# Altium PCB SB0037A.PcbDoc (part 5 of 7)
Units mil, origin at the board's own origin, x right, y up, seen from the top; angles counter-clockwise.
Board outline 2872.5 x 4560 mil, 6 copper layers (Top Layer, L2, L3, L4, L5, Bottom Layer), stack 30.268 mil thick; 282 components, 292 nets, 1320 pads, 687 vias.
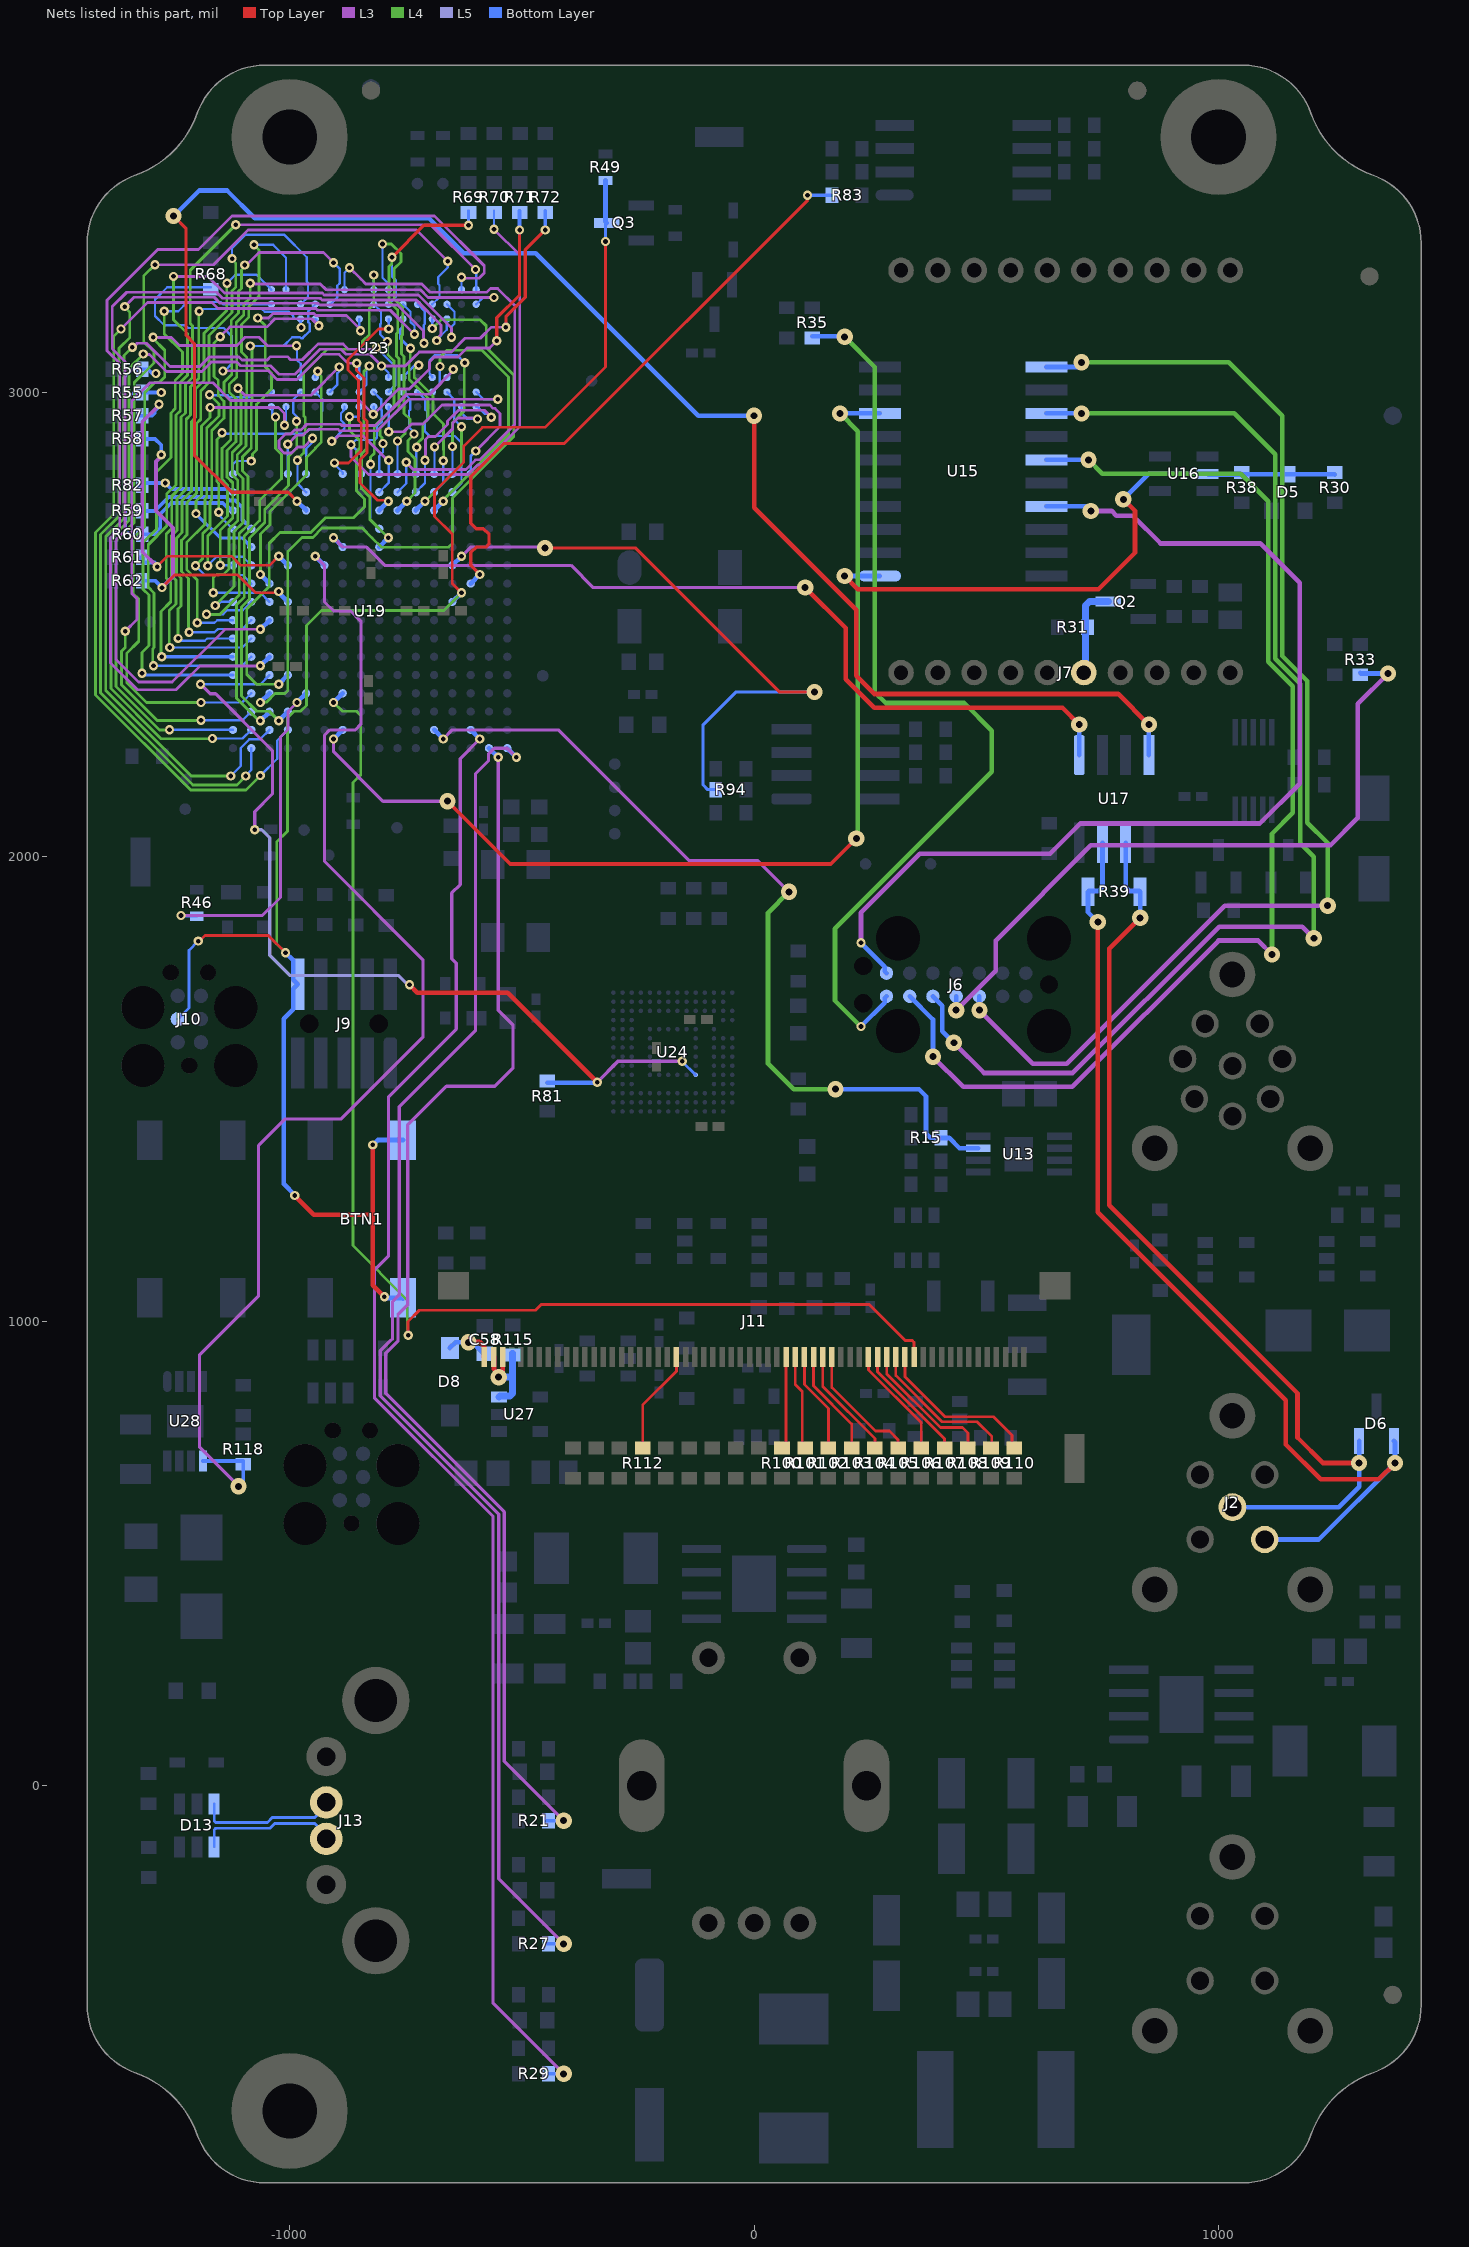
[diagram p7: the nets of this part, all layers, seen from the top]

## Via types
v1: diameter 20, hole 10, Top Layer to Bottom Layer, tented both sides, 484 vias
v2: diameter 35, hole 15, Top Layer to Bottom Layer, tented both sides, 197 vias
v3: diameter 20, hole 10, Top Layer to Bottom Layer, tented top, 6 vias

## Nets (pads, with @x,y where several pads share a name; then routed paths per layer and width w, separated by ;. In a path a pad name is that pad's centre, name@x,y a point inside that pad or via, vN(x,y) a via of type N, cw(c..) or ccw(c..) an arc to the next point about the centre after c; other vN are vias at no path point) (continued)
\LCD_RESET_N: J11.13 U19.K4 | length 2688.1
  Top Layer w6: v1(-745,970.47) -745,1000 -721,1024 -471,1024 -458.39,1036.61 247.83,1036.61 325.44,959 340.44,959 344.49,954.96 J11.13@344.49,923.23
  L4 w6: v1(-905.51,2332.68) -886.51,2313.68 -856,2313.68 -847,2304.68 -847,2177 -863.83,2160.17 -863.83,1163.25 -747,1046.43 -747,972.47 v1(-745,970.47)
  Bottom Layer w10: v1(-905.51,2332.68) U19.K4@-885.83,2352.36
\MODEM_RESET: J7.5 Q2.3 R31.1 | length 198.4
  Bottom Layer w15: J7.5@710.04,2397 713.54,2400.5 713.54,2495 713.54,2541.21 722.33,2550 Q2.3@762.6,2550
\RST: BTN1.A J9.10 J10.3 Q3.3 R49.1 U19.D9 | length 3868.1
  Top Layer w6: v1(-1197.15,1818.85) -1194.58,1818.85 -1182.43,1831 -1046,1831 v1(-1009,1794) ; v1(-629.92,2568.9) -650,2588.98 -650,2695 -688.29,2733.29 -688.29,2786.71 -625,2850 -625,2885 -585,2925 -450,2925 -320,3055 v1(-320,3325)
  Top Layer w10: v1(-989,1271) -948,1230 -821,1230 ; v1(-821,1380) -821,1230 ; v1(-796,1053) -821,1078 -821,1230
  L4 w6: v1(-1009,1794) -1028,1813 -1028,2032 -1004.62,2055.38 -1004.62,2299.81 -990.75,2313.68 -976.38,2313.68 -963.88,2326.18 -963.88,2498.03 -931.4,2530.51 -668.31,2530.51 v1(-629.92,2568.9)
  Bottom Layer w6: J10.3@-1241,1651 -1217,1675 -1217,1799 v1(-1197.15,1818.85) ; v1(-320,3325) -320,3362.4 Q3.3@-317.4,3365
  Bottom Layer w10: v1(-1009,1794) -992.5,1777.5 -992.5,1735.5 J9.10@-983,1726 -992.5,1716.5 -992.5,1672.5 -1013,1652 -1013,1296 v1@-988.5,1271.5 ; v1(-821,1380) -820.62,1380 -810.14,1390.47 BTN1.A@-756,1390.47 ; v1(-796,1053) -793.47,1050.47 BTN1.A@-756,1050.47 BTN1.A@-756,1049 ; U19.D9@-649.61,2549.21 v1(-629.92,2568.9) ; R49.1@-320,3456.46 -320,3367.6 Q3.3@-317.4,3365
\SD_RESET: R81.2 U19.P5 U24.K5 | length 2018.5
  Top Layer w10: v1(-742,1725) -725,1708 -530.91,1708 v1(-337.91,1515)
  L3 w7: v1(-1191.93,2372.05) -1171.44,2351.56 -1159.56,2351.56 -1037,2229 -1037,2136 -1075.33,2097.67 v1(-1075.33,2058.66)
  L3 w8: v1(-337.91,1515) -292.91,1560 v1(-155,1560)
  L5 w7: v1(-1075.33,2058.66) -1075.17,2058.5 -1060.5,2058.5 -1043,2041 -1043,1788 -1000,1745 -766,1745 -746,1725 v1(-742,1725)
  Bottom Layer w5: v1(-1191.93,2372.05) -1062.99,2372.05 U19.P5@-1043.31,2391.73
  Bottom Layer w6: v1(-155,1560) U24.K5@-125.79,1530.79
  Bottom Layer w10: R81.2@-445,1513.54 -339.37,1513.54 v1(-337.91,1515)
\SD_WP: R82.2 U19.T15 | length 209.7
  Bottom Layer w8: R82.2@-1321.46,2800 -1316.34,2805.12 v1(-1267.72,2805.12) -1254.92,2792.32 -1131.57,2792.32 -1124.68,2785.43 U19.T15@-1122.05,2785.43
\SENSOR_FAULT: R15.1 U13.3 U19.E2 | length 1887.9
  L3 w7: v1(-669.29,2253.94) -649.79,2273.44 -421.44,2273.44 -140,1992 8,1992 v2(75,1925)
  L4 w10: v2(75,1925) 30,1880 30,1555 85,1500 v2(175,1500)
  Bottom Layer w10: U19.E2@-688.98,2273.62 v1(-669.29,2253.94) ; v2(175,1500) 355,1500 370,1485 370,1405 379.56,1395.44 398.1,1395.44 398.54,1395 420,1395 442.21,1372.79 U13.3@482.4,1372.79
\SPIFI_CS: R83.2 U19.C10 | length 1339.3
  Top Layer w7: v1(-590.55,2608.27) -610.05,2627.77 -610.05,2655.72 -598.63,2667.14 -577.86,2667.14 -570.68,2674.32 -570.68,2694.72 -582.84,2706.88 -598.63,2706.88 -610.05,2718.3 -610.05,2818.83 -538.88,2890 -409.39,2890 115,3414.39 v1(115,3425)
  Bottom Layer w7: v1(115,3425) R83.2@171.46,3425
  Bottom Layer w10: U19.C10@-610.24,2588.58 v1(-590.55,2608.27)
\SSP1_CS_FRAM: R94.2 U19.D11 | length 1359.7
  Top Layer w7: v2(-450,2665) -255,2665 55,2355 v2(130,2355)
  L3 w7: v1(-629.92,2647.64) -610.42,2667.14 -452.14,2667.14 v2(-450,2665)
  Bottom Layer w7: R94.2@-78.54,2145 -100,2145 -110,2155 -110,2285 -40,2355 v2(130,2355)
  Bottom Layer w10: U19.D11@-649.61,2627.95 v1(-629.92,2647.64)
\TRST: R46.1 U19.M4 | length 727.1
  L3 w6: v1(-1234,1874) -1059.07,1874 -1020,1913.07 -1020,2258 -1003.45,2274.55 -1003.45,2313.48 v1(-984.25,2332.68)
  Bottom Layer w6: v1(-1234,1874) -1232.46,1872.46 R46.1@-1200,1872.46
  Bottom Layer w10: v1(-984.25,2332.68) U19.M4@-964.57,2352.36
\USB_HOST_FAULT: R118.1 U19.L11 U28.5 | length 2695.6
  L3 w7: v2(-1110,645) -1194,729 -1194,928.5 -1067,1055.5 -1067,1379 -1010,1436 -889,1436 -713,1612 -713,1778.5 -925.01,1990.51 -925.01,2262.01 -913.41,2273.62 -858.25,2273.62 -846.5,2285.37 -846.5,2507.5 -868.53,2529.53 -905.53,2529.53 -925.01,2549.01 -925.01,2627.77 v1(-944.88,2647.64)
  Bottom Layer w8: U28.5@-1186.61,699.37 -1100,699.37 -1100,655 v2(-1110,645)
  Bottom Layer w10: v1(-944.88,2647.64) U19.L11@-925.2,2627.95
B0: J11.18 R106.1 | length 246.9
  Top Layer w6: J11.18@246.06,923.23 246.06,895.67 360,781.73 R106.1@360,723.54
B1: J11.17 R107.1 | length 259.5
  Top Layer w6: J11.17@265.75,923.23 265.75,891.54 397.45,759.84 397.64,759.84 410,747.48 R107.1@410,723.54
B2: J11.16 R108.1 | length 300.1
  Top Layer w6: J11.16@285.43,923.23 285.43,887.41 401,771.84 402.61,771.84 402.8,771.65 448.35,771.65 460.63,759.37 460.63,724.17 R108.1@460,723.54
B3: J11.15 R109.1 | length 330.2
  Top Layer w6: J11.15@305.12,923.23 305.12,883.28 404.56,783.84 479.94,783.84 511.81,751.97 511.81,725.35 R109.1@510,723.54
B4: J11.14 R110.1 | length 361.1
  Top Layer w6: J11.14@324.8,923.23 324.8,880.8 410.76,794.84 515.16,794.84 555.08,754.92 555.08,723.54 R110.1@560,723.54
BL+: C58.2 D8.2 J11.60 | length 151.5
  Top Layer w10: v2(-615,955) -614.14,955.86 -590.86,955.86 -581.61,946.61 -581.61,924.13 J11.60@-580.71,923.23
  Bottom Layer w10: D8.2@-655,942.83 -642.83,955 v2(-615,955) -610.22,950.22 -601.72,950.22 -581.97,930.46 C58.2@-580,930.46
BL-: J11.58 J11.59 R115.2 U27.3 | length 243.5
  Top Layer w10: J11.59@-561.02,923.23 -560.12,922.32 -560.12,896.88 -550,886.76 v2(-550,880) -541.34,888.66 J11.58@-541.34,923.23
  Bottom Layer w15: v2(-550,880) -520,880 ; U27.3@-549.29,837.4 -547.08,839.62 -525.38,839.62 -520,845 -520,880 ; R115.2@-520,931.46 -520,880
BOARD_ID0: R58.2 R62.1 U19.N9 | length 749.9
  Top Layer w6: v1(-1275,2580) -1247.72,2607.28 -1152.85,2607.28 -1152.56,2607.58 -1112.5,2607.58 -1073.82,2568.9 -1026.22,2568.9 v1(-1023.62,2571.5)
  L3 w8: v1(-1276.57,2866.14) -1276.57,2862.89 -1287.72,2851.75 -1287.72,2745.41 -1251,2708.69 -1251,2604 v1(-1275,2580)
  Bottom Layer w8: R62.1@-1321.46,2595 -1290,2595 v1(-1275,2580) ; R58.2@-1321.46,2900 -1289.76,2900 -1276.57,2886.81 v1(-1276.57,2866.14)
  Bottom Layer w10: v1(-1023.62,2571.5) -1023.62,2568.9 U19.N9@-1003.94,2549.21
BOARD_ID1: R57.2 R61.1 U19.N11 | length 797.8
  Top Layer w6: v1(-1285.5,2625.13) -1262.99,2647.64 -1125,2647.64 -1105.32,2627.95 -1043.31,2627.95 v1(-1023.62,2647.64)
  L3 w8: v1(-1285.5,2625.13) -1317.31,2656.94 -1317.31,2936.84 -1281.42,2972.73 v1(-1281.42,2974.45)
  Bottom Layer w8: R61.1@-1321.46,2645 -1321.46,2640.08 -1315.62,2634.24 -1290.96,2634.24 -1290.96,2633.84 -1285.5,2628.38 v1(-1285.5,2625.13) ; R57.2@-1321.46,2950 -1296.06,2950 -1290.41,2955.66 -1290.41,2960.49 -1281.42,2969.48 v1(-1281.42,2974.45)
  Bottom Layer w10: v1(-1023.62,2647.64) U19.N11@-1003.94,2627.95
BOARD_ID2: R56.2 R60.1 U19.T14 | length 697.4
  Bottom Layer w6: R60.1@-1321.46,2695 -1343.62,2695 -1353.35,2704.72 -1353.35,2744.29 -1357.28,2748.22 -1357.28,3031.5 -1337.6,3051.18 -1322.64,3051.18 R56.2@-1321.46,3050
  Bottom Layer w8: R60.1@-1321.46,2695 -1292.2,2695 -1278.54,2708.66 -1278.54,2738.51 -1254.79,2762.26 -1144.33,2762.26 -1136.65,2754.57 -1133.19,2754.57 -1124.68,2746.06 U19.T14@-1122.05,2746.06 ; R56.2@-1321.46,3050 -1304.54,3050 -1295.54,3041 v1(-1288,3041)
BOARD_ID3: R55.2 R59.1 U19.R13 | length 633.3
  Bottom Layer w6: R59.1@-1321.46,2745 -1338.5,2745 -1345.47,2751.97 -1345.47,2990.16 -1336.61,2999.02 -1322.44,2999.02 R55.2@-1321.46,3000
  Bottom Layer w8: R59.1@-1321.46,2745 -1290.43,2745 -1260.17,2775.26 -1137.13,2775.26 -1129.44,2767.57 -1116.98,2767.57 -1102.36,2752.95 -1102.36,2726.38 U19.R13@-1082.68,2706.69 ; R55.2@-1321.46,3000 v1(-1276.57,3000)
CAN0_H: D6.1 J2.4 R39.2 U17.7 | length 2175.3
  Top Layer w10: v2(740,1860) 740,1235 1145,830 1145,735 1220,660 1345,660 v2(1380,695)
  Bottom Layer w10: v2(740,1860) 718.9,1881.1 R39.2@718.9,1925 720.72,1926.82 741.82,1926.82 750,1935 U17.7@750,2030.51 ; J2.4@1099.4,530.44 1215.44,530.44 v2(1380,695) 1380,740 D6.1@1377.4,742.6
CAN0_L: D6.2 J2.5 R39.1 U17.6 | length 2045.8
  Top Layer w10: v2(831.1,1868.9) 765,1802.8 765,1250 1170,845 1170,750 1225,695 v2(1302.6,695)
  Bottom Layer w10: U17.6@800,2030.51 800,1935 808.18,1926.82 829.28,1926.82 R39.1@831.1,1925 v2(831.1,1868.9) ; J2.5@1029.8,600.05 1258.53,600.05 1302.6,644.12 v2(1302.6,695) D6.2@1302.6,742.6
CAN0_RD: U17.4 U19.M14 | length 3687.1
  Top Layer w7: v2(-1250,3380) -1223,3353 -1223,3123 -1205,3105 -1205,2865 -1125,2785 -1003.5,2785 v1(-984.25,2765.75)
  Top Layer w10: v2(0,2950) 0,2752 220,2532 220,2390 259,2351 784,2351 v2(850,2285)
  Bottom Layer w10: v2(-1250,3380) -1195,3435 -1135,3435 -1075,3375 -700,3375 -625,3300 -470,3300 -120,2950 v2(0,2950) ; v1(-984.25,2765.75) U19.M14@-964.57,2746.06 ; U17.4@850,2219.49 v2(850,2285)
CAN0_TD: U17.1 U19.K12 | length 1929.8
  Top Layer w10: v2(110,2580) 197,2493 197,2383 259,2321 664,2321 v2(700,2285)
  L3 w7: v1(-905.51,2687.01) -885.64,2667.14 -834.48,2667.14 -795.11,2627.77 -394.05,2627.77 -346.28,2580 v2(110,2580)
  Bottom Layer w10: v1(-905.51,2687.01) U19.K12@-885.83,2667.32 ; U17.1@700,2219.49 v2(700,2285)
CELL_RESET: U15.8 U19.K2 | length 2322
  Top Layer w8: v2(-660,2120) -525,1985 165,1985 v2(220,2040)
  L3 w7: v1(-905.51,2253.94) -905.51,2226.36 -799.15,2120 v2(-660,2120)
  L4 w10: v2(185,2955) 223.5,2916.5 223.5,2043.5 v2(220,2040)
  Bottom Layer w10: v1(-905.51,2253.94) U19.K2@-885.83,2273.62 ; v2(185,2955) U15.8@270.87,2955
DE: J11.39 R112.1 | length 229.8
  Top Layer w6: R112.1@-240,723.54 -240,820 -167.32,892.68 J11.39@-167.32,923.23
EMC_A0: R69.2 U19.H16 U23.G8 | length 841.4
  Top Layer w7: v1(-779.53,3291.34) -710.87,3360 v1(-615,3360)
  L4 w6: v1(-799,2890.18) -800.94,2892.12 -800.94,2903.11 -805.46,2907.63 -805.46,2923.37 -764.64,2964.18 -764.64,3072.8 -770,3078.16 -770,3126.55 -767.46,3129.09 -767.46,3177.96 -785.91,3196.41 -785.91,3271.28 -780.12,3277.07 -780.12,3290.74 v1(-779.53,3291.34)
  Bottom Layer w5: U19.H16@-807.09,2824.8 -807.09,2863.19 -799,2871.28 v1(-799,2890.18) v1@-801.75,2890.18 ; U23.G8@-787.4,3189.96 -771.65,3205.71 -771.65,3242.13 -779.53,3250 v1(-779.53,3291.34)
  Bottom Layer w6: v1(-615,3360) R69.2@-615,3391.46
EMC_A1: U19.G16 U23.G9 | length 659.4
  L4 w6: v1(-800.2,3319.88) -781.2,3319.88 -760.53,3299.21 -760.53,3281.11 -774.91,3266.73 -774.91,3200.97 -756.46,3182.52 -756.46,3124.54 -759,3121.99 -759,3082.72 -753.64,3077.36 -753.64,2955.22 -741.14,2942.73 -741.14,2928.62 -751.32,2918.45 -751.32,2912.07 v1(-767.72,2895.67)
  Bottom Layer w5: v1(-800.2,3319.88) -800.2,3247.05 -787.4,3234.25 U23.G9@-787.4,3221.46 ; U19.G16@-767.72,2824.8 v1(-767.72,2895.67)
EMC_A2: U19.F16 U23.F7 | length 377.3
  L4 w6: v1@-745.12,3098.58 -740.16,3093.62 -740.16,3068.21 -742.64,3065.73 -742.64,3028.07 -702.41,2987.84 -702.41,2942.57 -713.32,2931.66 -713.32,2902.71 -725.7,2890.32 -725.7,2882.74 v1(-726.41,2882.03)
  Bottom Layer w6: U23.F7@-755.91,3158.46 -756.34,3158.03 -756.34,3141.59 -761.85,3136.08 -761.85,3116.44 -740.41,3095 v1(-740,3095) ; U19.F16@-728.35,2824.8 -727.66,2825.49 -727.66,2879.38 v1@-728.35,2880.06
EMC_A3: U19.E15 U23.F3 | length 369
  L4 w6: v1(-722.32,3058.94) -722.32,3060.07 -722.44,3060.19 -731.64,3050.99 -731.64,3032.63 -691.41,2992.4 -691.41,2955.19 -668.61,2932.39 -668.61,2875.99 -668.31,2875.69 -668.31,2859.25 -669.29,2858.27 v1(-669.29,2853.35)
  Bottom Layer w5: U23.F3@-755.91,3032.48 -755.91,3033.56 -723.52,3065.94 -722.32,3064.75 v1(-722.32,3058.94) ; U19.E15@-688.98,2785.43 -669.29,2805.12 v1(-669.29,2853.35)
EMC_A4: U19.C16 U23.G1 | length 481.4
  L3 w6: v1(-786.46,2915.5) -754.27,2915.5 -737.83,2931.93 -713.05,2931.93 -672.07,2972.91 -568.91,2972.91 -561.99,2965.99 -558.1,2965.99 -546.97,2954.86 -546.97,2926.45 v1(-599.41,2874.02)
  Bottom Layer w5: U23.G1@-787.4,2969.49 -786.93,2969.02 -786.93,2915.97 v1(-786.46,2915.5)
  Bottom Layer w6: U19.C16@-610.24,2824.8 -610.24,2863.19 v1(-599.41,2874.02)
EMC_A5: U19.P2 U23.G2 | length 1961.1
  L3 w6: v1(-1338.58,3097.44) -1336.63,3097.44 -1328.07,3106 -1307.87,3106 -1257.87,3056 -1193.69,3056 -1173.28,3076.41 -1109.09,3076.41 -1102.69,3070 -1048.33,3070 -1041.11,3077.22 -1004.97,3077.22 -998.3,3070.55 -972.86,3070.55 -939.24,3104.16 -884.86,3104.16 -874.05,3093.36 -819.88,3093.36 -816.78,3096.46 v1(-812.99,3096.46)
  L4 w6: v1(-1338.58,3097.44) -1356.64,3079.39 -1356.64,2729.08 -1396,2689.72 -1396,2358.22 -1211.99,2174.21 v1(-1126.97,2174.21)
  Bottom Layer w5: v1(-1126.97,2174.21) -1105.42,2195.76 -1105.42,2234.64 -1086.74,2253.32 -1063.61,2253.32 U19.P2@-1043.31,2273.62 ; v1(-812.99,3096.46) -772.03,3055.49 -772.03,3016.36 U23.G2@-787.4,3000.98
EMC_A6: R72.2 U19.R2 U23.G3 | length 2308.4
  Top Layer w7: v1(-534.45,3140.75) -534.45,3163.58 -493,3205.03 -493,3307 v1(-450,3350)
  L3 w6: v1(-1315,3083) -1313.57,3081.56 -1301.57,3081.56 -1265,3045 -1189.13,3045 -1168.72,3065.41 -1113.65,3065.41 -1105.97,3057.73 -1041.09,3057.73 -1022.58,3039.22 -988.63,3039.22 -934.68,3093.16 -889.42,3093.16 -878.61,3082.36 -827.03,3082.36 -802.2,3057.53 v1(-802.2,3057.24) -751.13,3057.24 -732.37,3076 -732.13,3076 -720.83,3087.3 -651.7,3087.3 -622.17,3116.83 -589.57,3116.83 -565.65,3140.75 v1(-534.45,3140.75)
  L4 w6: v1(-1315,3083) -1345.64,3052.36 -1345.64,2724.52 -1385,2685.16 -1385,2362.77 -1276.85,2254.62 -1166.64,2254.62 v1(-1166.34,2254.92)
  Bottom Layer w5: v1(-1166.34,2254.92) -1101.38,2254.92 U19.R2@-1082.68,2273.62 ; v1(-802.2,3057.24) -787.4,3042.43 U23.G3@-787.4,3032.48
  Bottom Layer w8: v1(-450,3350) R72.2@-450,3391.46
EMC_A7: R71.2 U19.R3 U23.H1 | length 2170.6
  Top Layer w7: v1(-554.13,3111.22) -554.13,3160.87 -505,3210 v1(-505,3350)
  L3 w6: v1(-1354,2486) -1329,2511 -1329,2556 -1340,2567 -1340,2982 -1301,3021 -1165,3021 -1127,2983 -850.02,2983 v1(-819.92,2952.9) -765.44,3007.38 -742.62,3007.38 -699,3051 -699,3066 -688.7,3076.3 -637.58,3076.3 -617.88,3096 -569.35,3096 v1(-554.13,3111.22)
  L4 w6: v1(-1354,2486) -1354,2451 -1362,2443 -1362,2370.89 -1310.11,2319 -1285.1,2293.99 -1191.24,2293.99 v1(-1190.94,2294.29)
  Bottom Layer w5: v1(-1190.94,2294.29) -1101.38,2294.29 U19.R3@-1082.68,2312.99 ; v1(-819.92,2952.9) -818.9,2953.92 U23.H1@-818.9,2969.49
  Bottom Layer w8: v1(-505,3350) R71.2@-505,3391.46
EMC_A8: R70.2 U19.J16 U23.H2 | length 1180.6
  L3 w6: v1(-868.11,2887.8) -868.11,2860.93 -830.53,2823.35 -616.16,2823.35 -595.49,2844.02 -586.98,2844.02 -504.45,2926.55 -504.45,3295.79 v1(-560.04,3351.38)
  Bottom Layer w5: U19.J16@-846.46,2824.8 -846.46,2866.14 v1(-868.11,2887.8) -867.73,2887.8 -857.68,2897.85 -817.5,2897.85 -812.01,2903.34 -812.01,2927.26 -801.42,2937.85 -801.42,2961.77 -803.15,2963.49 -803.15,2985.24 U23.H2@-818.9,3000.98 ; v1(-560.04,3351.38) -560.04,3391.42 R70.2@-560,3391.46
EMC_A9: R68.2 U19.H14 U23.J3 | length 1172.1
  Top Layer w6: v1(-855.36,3063.14) -856,3062.5 -856,3047.18 -839.92,3031.1 -839.92,2944.62 -833.66,2938.36 -833.66,2870.08 -848.43,2855.31 -848.43,2805.43 -811.04,2768.04 -797.57,2768.04 v1@-789.7,2768.04
  Top Layer w8: v1@-789.7,2768.04 v1(-787.4,2765.75)
  L3 w6: v1(-1143.76,3046.41) -1143.43,3046.73 -1045.64,3046.73 -1027.13,3028.22 -984.07,3028.22 -930.13,3082.16 -893.97,3082.16 -885.14,3073.33 -874.95,3063.14 v1(-855.36,3063.14)
  Bottom Layer w5: R68.2@-1170,3226.46 -1263.54,3226.46 -1290,3200 -1290,3165 -1270,3145 -1225,3145 -1218.73,3138.73 -1142,3138.73 -1125,3121.73 -1125,3061.23 -1139.82,3046.41 v1(-1143.76,3046.41) ; v1(-855.36,3063.14) -855.36,3061.05 -850.39,3056.09 U23.J3@-850.39,3032.48
  Bottom Layer w10: U19.H14@-807.09,2746.06 v1(-787.4,2765.75)
EMC_A10: U19.K16 U23.G7 | length 444.4
  Top Layer w6: v1(-903.54,2848.43) -873.03,2848.43 -845.66,2875.8 -845.66,2933.38 -852,2939.72 -852,3026.21 -874.36,3048.57 -874.36,3071.01 -808.4,3136.96 v1(-786.46,3136.96)
  Bottom Layer w5: v1(-903.54,2848.43) -903.54,2845.47 -885.83,2827.76 U19.K16@-885.83,2824.8 ; U23.G7@-787.4,3158.46 -786.93,3157.99 -786.93,3137.44 v1(-786.46,3136.96)
EMC_A11: U19.M15 U23.H9 | length 617.2
  L4 w6: v1(-983.32,2854.47) -983.32,2856.25 -969.83,2869.73 -969.83,2909.59 -966.28,2913.14 -966.28,2946.4 -969.83,2949.95 -969.83,3042.46 -918.93,3093.36 -851.64,3093.36 -842.99,3102.01 -842.99,3110.65 -828.48,3125.16 -828.48,3181.38 -818.9,3190.97 v1(-818.9,3252.95)
  Bottom Layer w5: v1(-983.32,2854.47) -983.32,2804.18 U19.M15@-964.57,2785.43 ; U23.H9@-818.9,3221.46 -818.9,3247.05 v1(-818.9,3252.95)
EMC_A13: U19.T16 U23.J7 | length 662.2
  L3 w6: v1(-1068.9,3160.43) -1045.59,3160.43 -1036.1,3169.92 -947.8,3169.92 -943.69,3165.81 -878,3165.81 -850.92,3138.73 -850.92,3138.63 v1@-852.55,3137
  L4 w6: v1(-1082.68,2852.36) -1080,2855.04 -1080,2867.71 -1071.73,2875.99 -1071.73,2974.53 -1039.07,3007.19 -1039.07,3042.02 -1052.65,3055.59 -1052.65,3144.18 v1(-1068.9,3160.43)
  Bottom Layer w5: U19.T16@-1122.05,2824.8 -1122.05,2845.47 -1115.16,2852.36 v1(-1082.68,2852.36) ; v1@-850.39,3134.84 U23.J7@-850.39,3158.46
  other v1: -847.48,3133.03
EMC_A14: U19.H13 U23.H8 | length 530.9
  L4 w6: v1(-825.79,2845.47) -825.79,2861.11 -818,2868.89 -818,2926.38 -775.64,2968.74 -775.64,3068.25 -789.03,3081.64 -789.03,3109.27 v1(-789.59,3109.83)
  Bottom Layer w5: v1(-825.79,2845.47) -825.79,2725.39 U19.H13@-807.09,2706.69 ; U23.H8@-818.9,3189.96 -803.52,3174.59 -803.52,3148.24 -804.96,3146.81 -804.96,3125.19 v1(-789.59,3109.83)
EMC_CKEOUT0: U19.H12 U23.J2 | length 504.7
  L4 w6: v1(-828.78,3057.24) -840.55,3045.47 -840.55,2903.35 -835,2897.8 -835,2878.48 -845.3,2868.18 -845.3,2792.94 -827.58,2775.23 -827.58,2727.19 v1(-787.4,2687.01)
  Bottom Layer w5: U23.J2@-850.39,3000.98 -834.65,3016.73 -834.65,3059.06 -832.83,3057.24 v1(-828.78,3057.24)
  Bottom Layer w10: U19.H12@-807.09,2667.32 v1(-787.4,2687.01)
EMC_CLK0: U19.N5 U23.J1 | length 901.1
  L4 w6: v1(-1023.62,2372.05) -1071.85,2372.05 -1092.52,2392.72 -1092.52,2533.48 -1043.99,2582.01 -1043.99,2675.49 -1020.67,2698.82 -954.72,2698.82 -923.23,2730.31 -862.2,2730.31 -838.58,2753.94 -838.58,2770.67 -856.3,2788.39 -856.3,2872.74 -849.11,2879.93 -849.11,2896.35 -871.06,2918.31 v1(-871.06,2947.83)
  Bottom Layer w5: v1(-871.06,2947.83) -851.38,2947.83 -850.39,2948.82 U23.J1@-850.39,2969.49
  Bottom Layer w10: v1(-1023.62,2372.05) U19.N5@-1003.94,2391.73
EMC_D0: U19.T5 U23.R8 | length 1280.3
  L4 w6: v1(-1317.91,2395.67) -1317.91,2440.42 -1303,2455.33 -1303,2564.02 -1315.5,2576.51 -1315.5,2676.88 -1286.72,2705.66 -1286.72,2829.13 -1255.68,2860.17 -1255.68,2956.04 -1246.57,2965.14 -1246.57,3026.14 -1231,3041.71 -1231,3086.96 -1270,3125.96 v1(-1270,3175)
  Bottom Layer w5: v1(-1270,3175) -1240,3175 -1220,3195 -1148.61,3195 -1143.61,3190 U23.R8@-1039.37,3189.96 U23.R8@-1039.37,3189.96
  Bottom Layer w6: v1(-1317.91,2395.67) -1314.12,2395.67 -1310.19,2391.73 U19.T5@-1122.05,2391.73
EMC_D1: U19.R7 U23.N7 | length 1193.7
  L4 w6: v1(-1257.94,2450.91) -1259.22,2452.19 -1259.22,2530.79 -1245,2545.01 -1245,2595.74 -1254.81,2605.56 -1254.81,2690.9 -1242.83,2702.88 -1242.83,2772.02 -1222.68,2792.17 -1222.68,2942.37 -1213.57,2951.47 -1213.57,2978.51 -1213.57,3012.47 -1195.76,3030.29 -1195.76,3174.24 v1(-1195,3175)
  Bottom Layer w5: v1(-1257.94,2450.91) -1102.24,2450.91 U19.R7@-1082.68,2470.47 ; v1(-1195,3175) -1190.94,3175 -1185.94,3180 -1060,3180 -1053.84,3173.84 -1001.51,3173.84 -992.5,3164.83 -992.5,3161.39 -989.57,3158.46 U23.N7@-976.38,3158.46 -975.91,3158 -975.91,3141.47 v1@-974.35,3139.92
  other v1: -975.44,3139.92
EMC_D2: U19.T7 U23.R9 | length 1055.9
  L4 w6: v1(-1240.22,2470.59) -1240.22,2534.23 -1234,2540.45 -1234,2600.3 -1243.81,2610.11 -1243.81,2686.34 -1231.83,2698.32 -1231.83,2767.47 -1211.68,2787.62 -1211.68,2937.82 -1202.57,2946.92 -1202.57,2983.06 -1202.57,3007.91 -1184.76,3025.73 -1184.76,3127.56 -1135.48,3176.84 -1135.48,3235.39 v1@-1134.9,3235.98
  Bottom Layer w5: v1(-1240.22,2470.59) -1234.97,2465.34 -1182.79,2465.34 -1177.66,2470.47 U19.T7@-1122.05,2470.47 ; v1(-1134.9,3235.39) -1116.79,3253.5 -1071.41,3253.5 U23.R9@-1039.37,3221.46
EMC_D3: U19.R8 U23.N8 | length 1332
  L4 w6: v1(-1216.54,2483.84) -1217.88,2485.18 -1217.88,2599.73 -1232.81,2614.67 -1232.81,2681.78 -1220.83,2693.77 -1220.83,2762.91 -1200.68,2783.06 -1200.68,2933.26 -1191.57,2942.36 -1191.57,2987.62 -1191.57,3003.36 -1173.76,3021.18 -1173.76,3123.01 -1124.48,3172.28 -1124.48,3218.94 -1115.9,3227.52 -1115.9,3277.87 -1124.02,3285.99 v1(-1124.02,3288.39)
  Bottom Layer w5: v1(-1216.54,2483.84) -1161.72,2483.84 -1154.56,2491 -1101.52,2491 U19.R8@-1082.68,2509.84 ; v1(-1124.02,3288.39) -1124.02,3310.98 -1095,3340 -1012.24,3340 -963.38,3291.14 -963.38,3239.26 -960.63,3236.51 -960.63,3205.71 U23.N8@-976.38,3189.96
EMC_D4: U19.T9 U23.P9 | length 1030.7
  L4 w6: v1(-1160.43,2541.34) -1119.61,2582.17 -1119.61,2700.62 -1100.62,2719.61 -1100.62,2814.74 -1112.68,2826.8 -1112.68,2866.15 -1093.73,2885.1 -1093.73,2983.65 -1092.27,2985.1 -1092.27,3075.26 -1104,3086.98 -1104,3146.09 -1087.9,3162.2 -1087.9,3185.43 -1066,3207.33 -1066,3307.14 v1(-1076.77,3317.91)
  Bottom Layer w5: v1(-1160.43,2541.34) -1156.37,2541.34 -1148.5,2549.21 U19.T9@-1122.05,2549.21 ; v1(-1076.77,3317.91) -1035.43,3317.91 -1007.87,3290.35 U23.P9@-1007.87,3221.46
EMC_D5: U19.R9 U23.M8 | length 962.6
  L4 w6: v1(-1179.19,2522.76) -1178.77,2522.34 -1150.66,2522.34 -1108.61,2564.39 -1108.61,2696.06 -1089.62,2715.05 -1089.62,2819.3 -1101.68,2831.36 -1101.68,2861.59 -1082.73,2880.54 -1082.73,2979.09 -1081.27,2980.54 -1081.27,3092.49 -1085,3096.21 v1(-1085,3100)
  Bottom Layer w5: v1(-1179.19,2522.76) -1143.3,2522.76 -1135.06,2531 -1100.89,2531 U19.R9@-1082.68,2549.21 ; v1(-1085,3100) -1013.6,3100 -994.56,3119.05 -977.62,3119.05 -975.65,3117.08 -972.12,3117.08 -956.94,3132.25 -956.94,3148.78 -960.26,3152.1 -960.26,3174.59 U23.M8@-944.88,3189.96
EMC_D6: U19.R10 U23.M7 | length 921.4
  L3 w6: v1(-1149.66,3120.23) -1128.46,3141.43 -1049.03,3141.43 -1031.55,3158.92 -952.35,3158.92 -937.29,3143.85 v1(-937.05,3143.85)
  L4 w6: v1(-1202.81,2627.1) -1202.81,2627.39 -1187.24,2642.97 -1187.24,2696.25 -1171.62,2711.87 -1171.62,2765.46 -1167.68,2769.39 -1167.68,2918.45 -1141.32,2944.81 -1141.32,2981.06 -1153.57,2993.32 -1153.57,3025.62 -1162.76,3034.8 -1162.76,3106.46 -1149.66,3119.55 v1(-1149.66,3120.23)
  Bottom Layer w5: v1(-1202.81,2627.1) -1182.8,2607.08 -1101.18,2607.08 U19.R10@-1082.68,2588.58 ; U23.M7@-944.88,3158.46 -942.83,3156.41 v1@-942.83,3141.82
EMC_D7: U19.R11 U23.L8 | length 1129
  L3 w6: v1(-1096.46,3274.61) -1093.21,3274.61 -1066.33,3301.48 -927.46,3301.48 v1(-905.51,3279.53)
  L4 w6: v1(-1176.24,2627.1) -1176.24,2691.69 -1160.62,2707.31 -1160.62,2707.39 -1133.62,2734.39 -1133.62,2801.07 -1145.68,2813.13 -1145.68,2879.82 -1126.73,2898.77 -1126.73,2982.03 -1141.27,2996.58 -1141.27,3022.02 -1124.76,3038.54 -1124.76,3076.63 -1126,3077.87 -1126,3155.21 -1109.9,3171.31 -1109.9,3217.97 -1104,3223.87 -1104,3264.09 -1096.46,3271.63 v1(-1096.46,3274.61)
  Bottom Layer w5: v1(-1176.24,2627.1) -1176.24,2627.48 -1157.27,2646.45 -1101.18,2646.45 U19.R11@-1082.68,2627.95 ; U23.L8@-913.39,3189.96 -912.4,3189.96 -897.64,3204.72 -897.64,3229.74 -891.89,3235.49 -891.89,3265.91 v1(-905.51,3279.53)
EMC_D8: U19.P9 U23.L2 | length 929.2
  L3 w6: v1(-1111.27,3009.01) -1096.27,2994 -954.29,2994 v1(-893.49,3054.81)
  L4 w6: v1(-1164.37,2568.9) -1164.37,2601.63 -1157.73,2608.27 -1142.42,2608.27 -1130.61,2620.08 -1130.61,2705.64 -1111.62,2724.63 -1111.62,2810.18 -1123.68,2822.25 -1123.68,2870.7 -1104.73,2889.66 -1104.73,2998.67 -1111.27,3005.22 v1(-1111.27,3009.01)
  Bottom Layer w5: v1(-1164.37,2568.9) -1062.99,2568.9 U19.P9@-1043.31,2549.21 ; U23.L2@-913.39,3000.98 -897.26,3017.11 -897.26,3041.42 -890.75,3047.93 -890.75,3052.07 v1(-893.49,3054.81)
EMC_D9: U19.P10 U23.M3 | length 536.6
  L4 w6: v1(-1062.99,2608.27) -1062.99,2695.01 -1042.62,2715.38 -1042.62,2743.69 -963.93,2822.39 -963.93,2860.08 -944.2,2879.81 -944.2,2880.9 -931.83,2893.26 -931.83,3034.69 -939.39,3042.25 v1(-939.39,3046.03)
  Bottom Layer w5: U23.M3@-944.88,3032.48 v1@-944.88,3046.03
  Bottom Layer w10: v1(-1062.99,2608.27) U19.P10@-1043.31,2588.58
EMC_D10: U19.T13 U23.M2 | length 531.7
  L4 w6: v1(-1152.62,2742.26) -1152.62,2804.52 -1156.68,2808.58 -1156.68,2898.79 -1145.73,2909.74 v1(-1145.73,2913.53)
  Bottom Layer w5: v1@-1158.46,2742.13 -1123.03,2706.69 U19.T13@-1122.05,2706.69 ; v1(-1145.73,2913.53) -1143.36,2911.16 -967.55,2911.16 -958.5,2920.22 -938.05,2920.22 -931.89,2926.38 -931.89,2958.45 -929.51,2960.83 -929.51,2985.61 U23.M2@-944.88,3000.98
EMC_D11: U19.R12 U23.P1 | length 620.6
  L3 w6: v1(-1171.32,2967.66) -1024.22,2967.66 -1011.28,2954.73 v1(-1011.28,2929.66)
  L4 w6: v1(-1201.83,2739.31) -1201.83,2766.35 -1189.68,2778.51 -1189.68,2927.56 -1171.32,2945.92 -1171.32,2964.14 v1@-1169.56,2965.9
  Bottom Layer w5: v1(-1011.28,2929.66) -1007.87,2933.07 U23.P1@-1007.87,2969.49
  Bottom Layer w7: v1(-1201.83,2739.31) -1149.53,2687.01 -1102.36,2687.01 U19.R12@-1082.68,2667.32
EMC_D12: U19.N3 U23.N2 | length 846.3
  L4 w6: v1(-1023.62,2293.31) -1043.99,2313.68 -1070.86,2313.68 -1103.52,2346.33 -1103.52,2538.37 -1086.61,2555.28 -1086.61,2686.95 -1053.62,2719.93 -1053.62,2748.25 -1002.32,2799.56 -1002.32,2862.34 -984.99,2879.67 -984.99,2937.84 v1(-985.28,2938.14)
  Bottom Layer w5: v1(-985.28,2938.14) -985.28,2941.39 -981.55,2945.13 -992.5,2956.08 -992.5,2984.86 U23.N2@-976.38,3000.98
  Bottom Layer w10: v1(-1023.62,2293.31) U19.N3@-1003.94,2312.99
EMC_D13: U19.P3 U23.R1 | length 773.6
  L4 w6: v1(-1062.99,2293.31) -1066.05,2293.31 -1114.52,2341.78 -1114.52,2542.92 -1097.61,2559.84 -1097.61,2691.51 -1064.62,2724.49 -1064.62,2767.38 -1017.47,2814.53 -1017.47,2866.35 -1030.57,2879.45 v1(-1030.57,2947.14)
  Bottom Layer w5: U23.R1@-1039.37,2969.49 -1037.31,2967.43 v1@-1037.31,2947.14
  Bottom Layer w10: v1(-1062.99,2293.31) U19.P3@-1043.31,2312.99
EMC_D14: U19.R4 U23.N3 | length 1497.9
  L3 w6: v1(-1294.1,3119.1) -1293.59,3118.59 -1254.59,3118.59 -1237.23,3101.23 -1113.77,3101.23 -1096,3119 -1065.78,3119 -1047.32,3100.55 v1(-985.28,3100.55)
  L4 w6: v1(-1294.1,3119.1) -1294.1,3116.04 -1269,3090.94 -1269,3033.13 -1280.13,3022 -1289.95,3022 -1312,2999.95 -1312,2711.49 -1337.5,2686 -1337.5,2567.4 -1325,2554.91 -1325,2464.44 -1351,2438.44 -1351,2375.44 -1308.23,2332.68 v1(-1190.94,2332.68)
  Bottom Layer w5: v1(-1190.94,2332.68) -1102.36,2332.68 U19.R4@-1082.68,2352.36 ; v1@-984.3,3097.59 -984.3,3069.9 -976.38,3061.98 U23.N3@-976.38,3032.48
EMC_D15: U19.T8 U23.R2 | length 757.5
  L4 w6: v1(-1198.88,2504.06) -1198.88,2596.29 -1221.81,2619.23 -1221.81,2677.23 -1182.62,2716.43 -1182.62,2770.01 -1178.68,2773.95 -1178.68,2923 -1152.32,2949.36 -1152.32,2975.53 -1172.27,2995.49 v1(-1172.57,2995.49)
  Bottom Layer w5: v1(-1198.88,2504.06) -1161.75,2504.06 -1155.97,2509.84 U19.T8@-1122.05,2509.84
  Bottom Layer w6: v1(-1172.57,2995.49) -1171.18,2994.09 -1134.43,2994.09 -1130.34,2990.01 -1086.47,2990.01 -1082.38,2994.09 -1048.9,2994.09 -1042.01,3000.98 U23.R2@-1039.37,3000.98
EMC_D16: U19.R1 U23.E8 | length 2135.7
  L3 w6: v1(-1355,3185) -1335,3205 -1162.49,3205 -1149.49,3192 -938.77,3192 -934.92,3188.16 -767.47,3188.16 -711.91,3132.6 -711.91,3107.58 v1(-710.63,3106.3)
  L4 w6: v1(-1355,3185) -1355,3183 -1344.19,3172.19 -1344.19,3118.7 -1367.64,3095.26 -1367.64,2733.64 -1407,2694.27 -1407,2353.66 -1208.55,2155.21 -1113.49,2155.21 v1(-1094.49,2174.21)
  Bottom Layer w5: v1(-1094.49,2174.21) -1094.49,2175.34 -1082.68,2187.15 U19.R1@-1082.68,2234.25 ; U23.E8@-724.41,3189.96 -709.04,3174.59 -709.04,3147.84 -711.41,3145.46 -711.41,3103.69 -710.63,3102.91 v1(-710.63,3106.3)
EMC_D17: U19.P4 U23.D7 | length 1489.9
  L4 w6: v1(-1062.99,2332.68) -1061.81,2333.86 -1049.31,2333.86 -1031.49,2351.68 -1010.53,2351.68 -1003.94,2358.27 -1003.94,2657.48 -973.6,2687.82 -950.17,2687.82 -929.99,2708 -843.83,2708 -822.93,2687.1 -822.74,2687.1 -802.64,2667 -657.8,2667 -649.61,2675.2 -649.61,2772.93 -517.54,2904.99 -517.54,3038.02 -576.77,3097.25 -576.77,3143.7 -589.57,3156.5 -674.21,3156.5 v1(-692.91,3137.8)
  Bottom Layer w5: v1(-692.91,3137.8) U23.D7@-692.91,3158.46
  Bottom Layer w10: v1(-1062.99,2332.68) U19.P4@-1043.31,2352.36
EMC_D18: U19.T2 U23.D8 | length 2049.5
  L3 w6: v1(-1290,3275) -1164.27,3275 -1089.56,3349.71 -726.68,3349.71 v1(-659.45,3282.48)
  L4 w6: v1(-1290,3275) -1314.34,3250.66 -1314.34,3109.41 -1291.97,3087.04 -1291.97,3063.9 -1334.64,3021.23 -1334.64,2719.97 -1374,2680.61 -1374,2367.33 -1314.67,2308 -1280.29,2273.62 v1(-1258.86,2273.62)
  Bottom Layer w5: v1(-1258.86,2273.62) U19.T2@-1122.05,2273.62 ; U23.D8@-692.91,3189.96 -677.54,3205.33 -677.54,3231.1 -679.92,3233.48 -679.92,3248.8 -659.45,3269.27 v1(-659.45,3282.48)
EMC_D19: U19.P6 U23.B9 | length 2225.2
  L3 w6: v1(-1062.99,2411.42) -1193.21,2411.42 -1244.63,2360 -1328,2360 -1386,2418 -1386,2686.84 -1365.64,2707.2 -1365.64,3062.47 -1393.19,3090.02 -1393.19,3198.68 -1284.1,3307.77 -1196.46,3307.77 -1124.01,3380.22 -688.35,3380.22 -581,3272.87 -581,3257.13 -592.13,3246 -627.89,3246 v1(-629.92,3248.03)
  Bottom Layer w5: U23.B9@-629.92,3221.46 v1(-629.92,3248.03)
  Bottom Layer w10: v1(-1062.99,2411.42) U19.P6@-1043.31,2431.1
EMC_D20: U19.R6 U23.C8 | length 1856
  L3 w6: v1(-1250,3250) -1176.37,3250 -1140.37,3214 -929.65,3214 -925.81,3210.16 -722.85,3210.16 -651.57,3138.88 v1(-651.57,3119.09)
  L4 w6: v1(-1293.31,2411.42) -1294.65,2412.76 -1294.65,2448.12 -1292,2450.77 -1292,2568.57 -1304.5,2581.07 -1304.5,2672.33 -1264.83,2711.99 -1264.83,2781.13 -1244.68,2801.29 -1244.68,2951.48 -1235.57,2960.59 -1235.57,2969.39 -1235.57,3021.58 -1220,3037.16 -1220,3126.69 -1250,3156.69 v1(-1250,3250)
  Bottom Layer w5: v1(-1293.31,2411.42) -1102.36,2411.42 U19.R6@-1082.68,2431.1 ; U23.C8@-661.42,3189.96 -645.3,3173.84 -645.3,3148.01 -651.57,3141.73 v1(-651.57,3119.09)
EMC_D21: U19.T6 U23.A9 | length 1763.5
  L3 w6: v1@-1116.14,3360.71 -1115.63,3361.22 -696.22,3361.22 v1(-600,3265)
  L4 w6: v1(-1275.65,2431.22) -1276.94,2432.5 -1276.94,2528.63 -1256,2549.56 -1256,2591.19 -1265.81,2601 -1265.81,2695.45 -1253.83,2707.44 -1253.83,2776.58 -1233.68,2796.73 -1233.68,2946.93 -1224.57,2956.03 -1224.57,2973.95 -1224.57,3017.03 -1209,3032.6 -1209,3143.59 -1214,3148.59 -1214,3263.36 v1(-1116.14,3361.22)
  Bottom Layer w5: v1(-600,3265) -598.43,3263.43 U23.A9@-598.43,3221.46
  Bottom Layer w7: v1(-1275.65,2431.22) -1275.59,2431.16 -1122.11,2431.16 U19.T6@-1122.05,2431.1
EMC_D22: U19.P8 U23.C7 | length 2028.8
  L3 w6: v1(-1062.99,2490.16) -1139.54,2490.16 -1253.03,2376.67 -1325.78,2376.67 -1374,2424.89 -1374,2683.28 -1354.64,2702.65 -1354.64,3067.02 -1382.19,3094.57 -1382.19,3184.68 -1350.87,3216 -1157.93,3216 -1144.93,3203 -934.21,3203 -930.37,3199.16 -727.41,3199.16 -673.91,3145.67 -673.91,3124.76 -683.09,3115.58 v1(-683.09,3111.8)
  Bottom Layer w5: v1(-683.09,3111.8) -683.09,3113.75 -661.57,3135.26 -661.57,3158.31 U23.C7@-661.42,3158.46
  Bottom Layer w10: v1(-1062.99,2490.16) U19.P8@-1043.31,2509.84
EMC_D23: U19.T11 U23.A8 | length 1267.4
  L3 w6: v1(-1085,3235) -1083.95,3233.95 -934.05,3233.95 -921.26,3221.16 -718.29,3221.16 -701.86,3204.72 v1(-560.04,3204.72)
  L4 w6: v1(-1149.61,2627.95) -1149.61,2702.84 -1122.62,2729.83 -1122.62,2805.63 -1134.68,2817.69 -1134.68,2875.26 -1115.73,2894.21 -1115.73,2986.59 -1130.27,3001.14 -1130.27,3017.46 -1113.76,3033.98 -1113.76,3081.18 -1115,3082.43 -1115,3150.65 -1098.9,3166.75 -1098.9,3189.99 -1085,3203.88 v1(-1085,3235)
  Bottom Layer w5: v1@-1150.59,2627.95 U19.T11@-1122.05,2627.95 ; U23.A8@-598.43,3189.96 -583.66,3204.72 v1(-560.04,3204.72)
EMC_D24: U19.N16 U23.A2 | length 611
  L3 w6: v1(-1003.99,2888.92) -984.77,2908.14 -971.28,2908.14 -958.7,2920.72 -895.69,2920.72 -892.81,2917.83 -810.99,2917.83 -743.44,2985.38 v1(-552.19,2985.38)
  Bottom Layer w5: v1(-1003.99,2888.92) -1003.94,2888.87 U19.N16@-1003.94,2824.8 ; U23.A2@-598.43,3000.98 -582.82,2985.38 v1(-552.19,2985.38)
EMC_D25: U19.M16 U23.C3 | length 656.5
  L3 w6: v1(-950.83,2901.72) -969.55,2883 -983.04,2883 -996.12,2869.92 -1011.86,2869.92 -1022.99,2881.05 -1022.99,2896.79 -1009.12,2910.66 -997.8,2910.66 -989.33,2919.14 -975.84,2919.14 -963.26,2931.72 -891.14,2931.72 -888.26,2928.83 -815.54,2928.83 -748,2996.38 -698.37,2996.38 -648,3046.75 v1(-648,3050)
  Bottom Layer w5: U19.M16@-964.57,2824.8 -964.59,2879.05 -947.98,2895.67 -950.83,2898.53 v1(-950.83,2901.72) ; U23.C3@-661.42,3032.48 -661.42,3033.46 -648,3046.88 v1(-648,3050)
EMC_D26: U19.F15 U23.A1 | length 344
  L3 w6: v1(-708.66,2854.33) -707.41,2855.58 -707.41,2898.59 -701,2905 -686.24,2905 -659.92,2931.32 -659.92,2938.61 -636.62,2961.91 -580.89,2961.91 v1(-565.97,2946.99)
  Bottom Layer w5: U19.F15@-728.35,2785.43 -708.66,2805.12 v1(-708.66,2854.33) ; U23.A1@-598.43,2969.49 -595.88,2969.49 -580.2,2953.8 -568.9,2953.8 -568.9,2949.92 v1(-565.97,2946.99)
EMC_D27: U19.F14 U23.C2 | length 308.7
  L4 w6: v1(-708.66,2765.75) -629.92,2844.49 v1(-629.92,2926.18)
  Bottom Layer w5: U23.C2@-661.42,3000.98 -645.67,2985.24 -645.67,2941.93 v1(-629.92,2926.18)
  Bottom Layer w10: U19.F14@-728.35,2746.06 v1(-708.66,2765.75)
EMC_D28: U19.E16 U23.B1 | length 238.4
  L3 w6: v1(-687.99,2882.87) -648.92,2921.94 -648.92,2934.05 -637.79,2945.18 -597.74,2945.18 v1(-595.47,2942.91)
  Bottom Layer w5: U19.E16@-688.98,2824.8 -687.99,2825.79 v1(-687.99,2882.87) ; U23.B1@-629.92,2969.49 -629.92,2955.71 -617.13,2942.91 v1(-595.47,2942.91)
EMC_D29: U19.E14 U23.D2 | length 613.1
  L4 w6: v1(-676.18,3056.1) -676.18,3075.82 -661,3091 -586.08,3091 -528.54,3033.46 -528.54,2909.55 -669.29,2768.81 v1(-669.29,2765.75)
  Bottom Layer w5: U23.D2@-692.91,3000.98 -676.79,3017.11 v1@-676.79,3056.1
  Bottom Layer w10: U19.E14@-688.98,2746.06 v1(-669.29,2765.75)
EMC_D30: U19.D16 U23.D3 | length 380.2
  L4 w6: v1(-649.61,2883.86) -649.61,2935.04 -624.02,2960.63 -624.02,3062.01 -625.98,3063.98 v1(-623.03,3063.98)
  Bottom Layer w5: U23.D3@-692.91,3032.48 -692.91,3034.7 -699,3040.78 -699,3069 -687.49,3080.51 -639.57,3080.51 v1(-623.03,3063.98) ; U19.D16@-649.61,2824.8 v1(-649.61,2883.86)
EMC_D31: U19.D15 U23.E2 | length 299.2
  Bottom Layer w5: U23.E2@-724.41,3000.98 -708.29,2984.86 -708.29,2963.12 -703.98,2958.81 -703.98,2940.57 -709.44,2935.1 -709.44,2916.86 -699.08,2906.5 -644.69,2906.5 -629.92,2891.73 -629.92,2805.12 U19.D15@-649.61,2785.43
EMC_DQMOUT0: U19.G15 U23.K9 | length 1055.5
  L3 w6: v1(-871.06,3268.7) -846.44,3244.08 -836.31,3233.95 -715.53,3233.95 -697.3,3215.72 -575.91,3215.72 -567.91,3223.72 -552.17,3223.72 -515.45,3187 -515.45,2931.11 -591.54,2855.02 -600.05,2855.02 -620.72,2834.35 -733.85,2834.35 v1(-749.05,2849.55)
  Bottom Layer w5: U23.K9@-881.89,3221.46 -881.89,3257.87 v1(-871.06,3268.7) ; U19.G15@-767.72,2785.43 -749.05,2804.1 v1(-749.05,2849.55)
EMC_DQMOUT1: U19.H15 U23.K1 | length 319.7
  L3 w6: v1(-909.49,2894.83) -906.56,2894.83 -894.59,2906.8 -842.48,2906.8 -790.02,2854.33 v1(-786.42,2854.33)
  Bottom Layer w5: v1(-909.49,2894.83) -881.89,2922.43 -881.89,2932.5 -889.56,2940.17 -889.56,2955.5 -881.89,2963.17 U23.K1@-881.89,2969.49 ; U19.H15@-807.09,2785.43 -786.42,2806.1 v1(-786.42,2854.33)
EMC_DQMOUT2: U19.N2 U23.F8 | length 2145.1
  L3 w6: v1(-1363.19,3136.81) -1306,3194 -1167.04,3194 -1154.04,3181 -943.32,3181 -939.48,3177.16 -783.34,3177.16 v1(-731.33,3125.15)
  L4 w6: v1(-1363.19,3136.81) -1378.64,3121.36 -1378.64,2738.19 -1418,2698.83 -1418,2349.11 -1213.11,2144.21 -1093.98,2144.21 v1(-1062.99,2175.2)
  Bottom Layer w5: v1(-1062.99,2175.2) -1026.95,2211.24 -1026.95,2250.61 U19.N2@-1003.94,2273.62 ; U23.F8@-755.91,3189.96 -739.78,3173.84 -739.78,3152.1 -731.33,3143.65 v1(-731.33,3125.15)
EMC_DQMOUT3: U19.G14 U23.F2 | length 294.1
  L4 w6: v1(-748.03,2765.75) -730.05,2783.73 -730.05,2857.42 -745.41,2872.78 -745.41,2896.8 -732.32,2909.89 v1(-732.32,2910.58)
  Bottom Layer w5: U23.F2@-755.91,3000.98 -740.53,2985.61 -740.53,2963.12 -742.94,2960.71 -742.94,2925.15 -732.32,2914.53 v1(-732.32,2910.58)
  Bottom Layer w10: U19.G14@-767.72,2746.06 v1(-748.03,2765.75)
ENC_BUTTON: R21.1 U19.B1 | length 2700.3
  L3 w7: v1(-551.18,2214.57) -551.18,1670.18 -519,1638 -519,1546 -558.46,1506.54 -662.54,1506.54 -746,1423.09 -746,1036 -766.5,1015.5 -766.5,957.95 -793,931.45 -793,844.86 -538,589.86 -538,53 v2(-410,-75)
  Bottom Layer w7: R21.1@-446.46,-75 v2(-410,-75)
  Bottom Layer w10: U19.B1@-570.87,2234.25 v1(-551.18,2214.57)
ENC_PHASE_A: R27.1 U19.A1 | length 2959.3
  L3 w7: v1(-511.81,2214.57) -531.31,2234.07 -559.26,2234.07 -572.06,2221.26 -572.06,2206.6 -600,2178.66 -600,1626 -764,1462 -764,1057.42 -778.5,1042.92 -778.5,962.92 -783,958.42 -805,936.42 -805,839.89 -550,584.89 -550,-200 v2(-410,-340)
  Bottom Layer w7: R27.1@-446.46,-340 v2(-410,-340)
  Bottom Layer w10: U19.A1@-531.5,2234.25 v1(-511.81,2214.57)
ENC_PHASE_B: R29.1 U19.C2 | length 3208.9
  L3 w7: v1(-590.55,2253.94) -633,2211.49 -633,1940.58 -651,1922.58 -651,1780.79 -641.5,1771.29 -641.5,1629.5 -787,1484 -787,1140.97 -817.5,1110.47 -817.5,835.42 -562,579.92 -562,-468 v2(-410,-620)
  Bottom Layer w7: R29.1@-446.46,-620 v2(-410,-620)
  Bottom Layer w10: U19.C2@-610.24,2273.62 v1(-590.55,2253.94)
EXT_USB_HOST_D_N: D13.6 J13.2 | length 301.9
  Bottom Layer w6: D13.6@-1162.6,-38.74 -1162.6,-75.18 -1159.08,-78.7 -1047.7,-78.7 -1037.4,-68.4 -946,-68.4 -921.18,-43.58 J13.2@-921.18,-35.58
EXT_USB_HOST_D_P: D13.1 J13.3 | length 302.4
  Bottom Layer w6: D13.1@-1162.6,-131.26 -1162.6,-94.81 -1159.08,-91.3 -1042.48,-91.3 -1032.18,-81 -946,-81 -921.18,-105.82 J13.3@-921.18,-114.32
FTDI_CTS: J6.7 R35.1 | length 2036.7
  L4 w10: v2(195,3120) 260,3055 260,2355 283.5,2331.5 452.19,2331.5 512,2271.69 512,2183.82 174,1845.82 174,1691 v1(230,1635)
  Bottom Layer w10: R35.1@125,3121.46 193.54,3121.46 v2(195,3120) ; v1(230,1635) 281.36,1686.36 281.36,1696.36 J6.7@285,1700
FTDI_DTR: J6.5 U15.13 | length 2667
  L3 w10: v2(430,1600) 495,1535 686.21,1535 1001.21,1850 1180,1850 v2(1205,1825)
  L4 w10: v2(705,2955) 1033.79,2955 1122,2866.79 1122,2426.48 1175.89,2372.59 1175.89,2029.11 1205,2000 v2(1205,1825)
  Bottom Layer w10: J6.5@385,1700 405,1680 405,1625 v2(430,1600) ; U15.13@629.13,2955 v2(705,2955)
FTDI_PATH: D5.3 R30.1 R38.2 U15.1 U16.2 | length 1349.6
  Top Layer w10: v2(195,2605) 223.5,2576.5 741.5,2576.5 820,2655 820,2745 v2(795,2770)
  Bottom Layer w10: v2(195,2605) U15.1@270.87,2605 ; v2(795,2770) 850,2825 U16.2@976.57,2825 978.03,2823.54 1050,2823.54 1050.83,2824.37 D5.3@1150,2824.37 1249.17,2824.37 R30.1@1250,2823.54
FTDI_RESET: J6.8 U15.17 | length 2259.1
  L3 w10: v1(230,1815) 230,1880 357,2007 637,2007 702,2072 1089,2072 1175,2158 1175,2590 1090,2675 875,2675 815,2735 780,2735 770,2745 v2(725,2745)
  Bottom Layer w10: v1(230,1815) 281.36,1763.64 281.36,1753.64 J6.8@285,1750 ; U15.17@629.13,2755 715,2755 v2(725,2745)
FTDI_RTS: J6.6 U15.15 | length 2581.9
  L3 w10: v2(385,1570) 450,1505 685,1505 1000,1820 1085,1820 v2(1115,1790)
  L4 w10: v2(720,2855) 750,2825 1048,2825 1107,2766 1107,2420.27 1160,2367.27 1160,2095 1115,2050 v2(1115,1790)
  Bottom Layer w10: J6.6@335,1700 385,1650 v2(385,1570) ; U15.15@629.13,2855 v2(720,2855)
FTDI_RX: J6.4 R33.2 | length 1503.1
  L3 w10: v2(435,1670) 520,1755 520,1820 725,2025 1241,2025 1300,2084 1300,2330 v2(1365,2395)
  Bottom Layer w10: v2(435,1670) J6.4@435,1700 ; R33.2@1305,2396.46 1306.46,2395 v2(1365,2395)
FTDI_TX: J6.3 U15.11 | length 2626.1
  L3 w10: v2(485,1670) 600,1555 673,1555 1013,1895 v2(1235,1895)
  L4 w10: v2(705,3065) 1022,3065 1137,2950 1137,2432.69 1190.89,2378.8 1190.89,2074.11 1235,2030 v2(1235,1895)
  Bottom Layer w10: v2(485,1670) J6.3@485,1700 ; U15.11@629.13,3055 699.14,3055 705,3060.86 v2(705,3065)
G0: J11.27 R100.1 | length 204.6
  Top Layer w6: R100.1@60,723.54 62.06,723.54 68.9,730.39 J11.27@68.9,923.23
G1: J11.26 R101.1 | length 208.6
  Top Layer w6: J11.26@88.58,923.23 88.58,864.17 103.5,849.26 103.5,730.04 R101.1@110,723.54
G2: J11.25 R102.1 | length 221.1
  Top Layer w6: J11.25@108.27,923.23 108.27,864.17 160,812.44 R102.1@160,723.54
G3: J11.24 R103.1 | length 233.7
  Top Layer w6: J11.24@127.95,923.23 127.95,861.46 210,779.41 R103.1@210,723.54
G4: J11.23 R104.1 | length 246.2
  Top Layer w6: J11.23@147.64,923.23 147.64,860.24 260,747.87 R104.1@260,723.54
G5: J11.22 R105.1 | length 276.5
  Top Layer w6: J11.22@167.32,923.23 167.32,857.52 261.06,763.78 291.34,763.78 310,745.12 R105.1@310,723.54